# Altium PCB Carte_MiniPAMI 2024.PcbDoc
Units mm, origin at the board's own origin, x right, y up, seen from the top; angles counter-clockwise.
Board outline 21 x 11 mm, 2 copper layers (Component Side, Solder Side), stack 1.57 mm thick; 29 components, 17 nets, 67 pads, 17 vias.
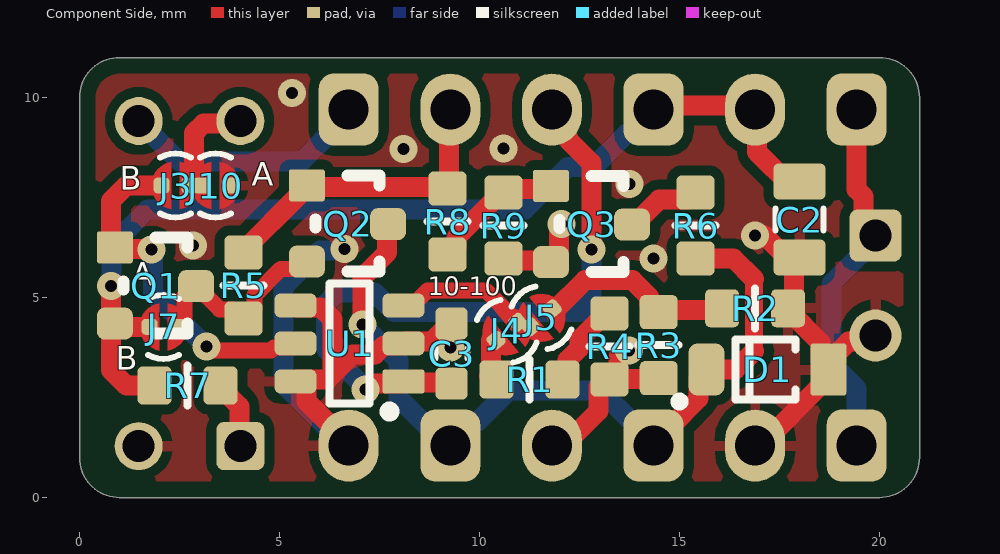
[diagram p0: Component Side view]
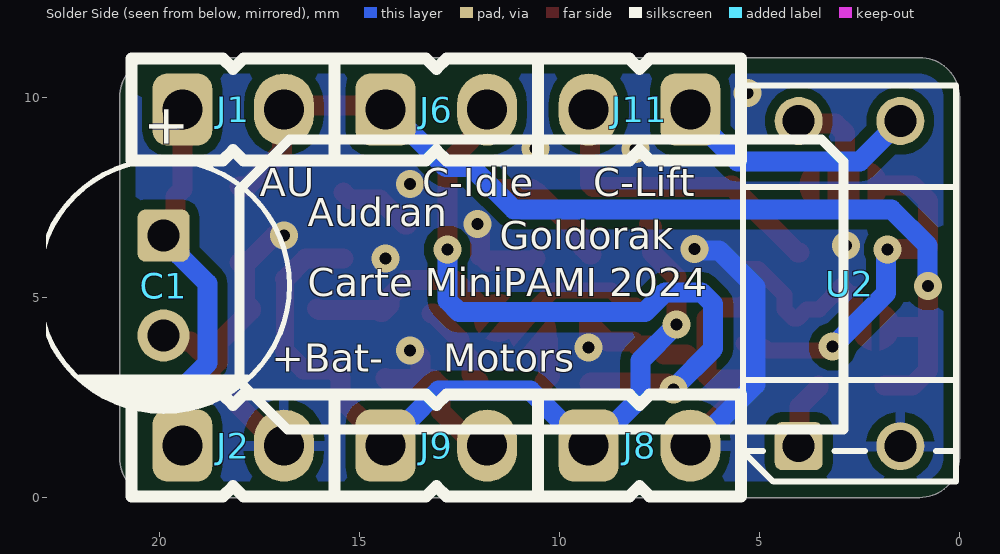
[diagram p1: Solder Side view, seen from below]
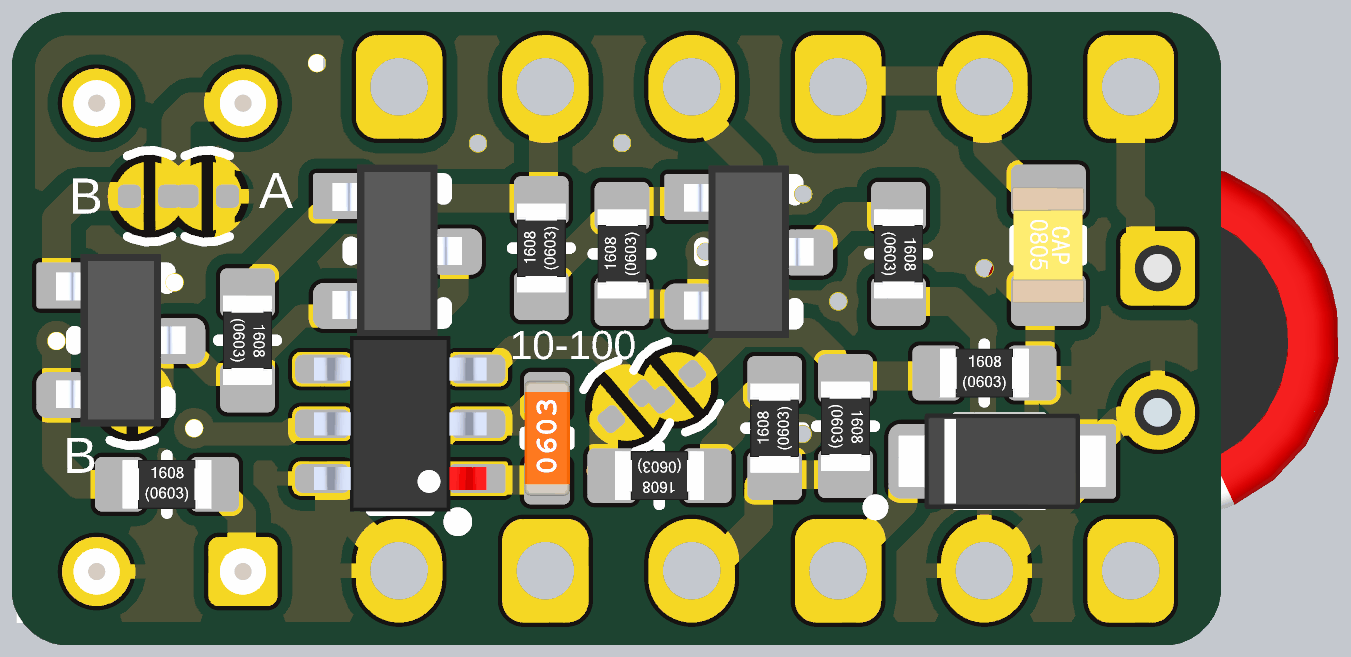
[diagram p2: 3D render of the assembled board from above, using the file's embedded part models]

## Layer stack, top to bottom
Top Solder: solder mask 0.01, Solder Resist, Dk 3.5
Component Side: signal copper 0.035
Dielectric 1: core 1.5, FR-4, Dk 4.8
Solder Side: signal copper 0.035
Bottom Solder: solder mask 0.01, Solder Resist, Dk 3.5

## Board outline
0,1 ccw(c1,1) 1,0 20,0 ccw(c20,1) 21,1 21,10 ccw(c20,10) 20,11 1,11 ccw(c1,10) 0,10

## Design rules (kind name [scope] priority, off if disabled: settings)
AssemblyTestPointUsage [All] p1 off:
AssemblyTestpoint [All] p1 off: testpointundercomponent=TRUE minsize=1.016 maxsize=2.54 preferedsize=1.524 minholesize=0 maxholesize=1.016 preferedholesize=0.813 testpointgrid=0.025 usegrid=TRUE gridtolerance=0 allowsidetop=TRUE allowsidebottom=TRUE
BoardOutlineClearance BoardOutlineClearance-Silk [All - OnSilkscreen] p1: gap=0.4 ignorepadtopadclearanceinfootprint=FALSE
BoardOutlineClearance BoardOutlineClearance_all [All] p2 off: gap=0.4 ignorepadtopadclearanceinfootprint=FALSE
Clearance Clearance_polygon [InPolygon] p1: gap=0.25 ignorepadtopadclearanceinfootprint=FALSE
Clearance Clearance_for_power_net [InNetClass('Power') vs InNet('GND')] p2: gap=0.2 ignorepadtopadclearanceinfootprint=TRUE except(0: Arc-Hole Track-Hole SMDPad-Hole THPad-Hole Via-Hole Fill-Hole Poly-Hole Region-Hole Text-Hole)
Clearance Clearance_general [All] p3: gap=0.15 ignorepadtopadclearanceinfootprint=FALSE
ComponentClearance [All] p1: gap=0 collisioncheckmode=3 verticalgap=0 showdistances=FALSE
DiffPairsRouting [All] p1 off: maxlimit=0.254 minlimit=0.127 mostfreqgap=0.254 toplayer_minwidth=0.381 toplayer_maxwidth=0.381 toplayer_prefwidth=0.381 bottomlayer_minwidth=0.381 bottomlayer_maxwidth=0.381 bottomlayer_prefwidth=0.381 maxuncoupledlength=12.7
FabricationTestPointUsage TestPointUsage [All] p1 off: valid=0 allowmultiple=FALSE
FabricationTestpoint Testpoint [All] p1 off: side=3 testpointundercomponent=TRUE minsize=1.016 maxsize=2.54 preferedsize=1.524 minholesize=0 maxholesize=1.016 preferedholesize=0.813 testpointgrid=0.025 allowsidetop=TRUE allowsidebottom=TRUE usegrid=TRUE gridtolerance=0
FanoutControl Fanout_BGA [IsBGA] p1 off: bgadir=Out bgaviamode=Centered fanoutstyle=Auto fanoutdirection=Alternating viagrid=0.025 // Fanout_BGA (Default Rule)
FanoutControl Fanout_LCC [IsLCC] p2 off: bgadir=Out bgaviamode=Centered fanoutstyle=Auto fanoutdirection=Alternating viagrid=0.025 // Fanout_LCC (Default Rule)
FanoutControl Fanout_SOIC [IsSOIC] p3 off: bgadir=Out bgaviamode=Centered fanoutstyle=Auto fanoutdirection=Alternating viagrid=0.025 // Fanout_SOIC (Default Rule)
FanoutControl Fanout_Small [(CompPinCount < 5)] p4 off: bgadir=Out bgaviamode=Centered fanoutstyle=Auto fanoutdirection=OutThenIn viagrid=0.025 // Fanout_Small (Default Rule)
FanoutControl Fanout_Default [All] p5 off: bgadir=Out bgaviamode=Centered fanoutstyle=Auto fanoutdirection=Alternating viagrid=0.025 // Fanout_Default (Default Rule)
Height [All] p1: minheight=0 maxheight=50 prefheight=10
HoleSize [All] p1: absolutevalues=TRUE maxlimit=6.3 minlimit=0.2 maxpercent=80.000 minpercent=20.000
HoleToHoleClearance [All] p1: gap=0.4 allowstackedmicrovias=TRUE
MinimumAnnularRing [All] p1: minimumring=0.076
MinimumSolderMaskSliver [All] p1: minsoldermaskwidth=0.1
MinimumSolderMaskSliver SilkscreenOverComponentPads [All] p2 off: minsoldermaskwidth=0.254
NetAntennae [All] p1 off: netantennaetolerance=0
PlaneClearance [All] p1: clearance=0.5
PlaneConnect [All] p1: planeconnectstyle=Relief reliefexpansion=0.4 reliefentries=4 reliefconductorwidth=0.3 reliefairgap=0.2
PolygonConnect PolygonConnect_Via_Power [InNetClass('PWR_20A') OR InNetClass('PWR_35A')] p1: connectstyle=Direct reliefconductorwidth=0.25 reliefentries=4 polygonreliefangle="90 Angle" airgapwidth=0.254
PolygonConnect [All] p2: thpad.connectstyle=Relief thpad.reliefconductorwidth=0.25 thpad.reliefentries=4 thpad.polygonreliefangle="90 Angle" thpad.airgapwidth=0.254 smdpad.connectstyle=Relief smdpad.reliefconductorwidth=0.25 smdpad.reliefentries=4 smdpad.polygonreliefangle="90 Angle" smdpad.airgapwidth=0.254 via.connectstyle=Direct via.reliefconductorwidth=0.25 via.reliefentries=4 via.polygonreliefangle="90 Angle" via.airgapwidth=0.254
PolygonConnect PolygonConnect_Via_GND [All vs InNet('GND')] p3: connectstyle=Direct reliefconductorwidth=0.25 reliefentries=4 polygonreliefangle="90 Angle" airgapwidth=0.254
RoutingCorners [All] p1: cornerstyle=45-Degree minsetback=1.5 maxsetback=2.54
RoutingVias [All] p1: holewidth=0.3 width=0.7 viastyle="Through Hole" minholewidth=0.3 minwidth=0.7 maxholewidth=0.3 maxwidth=1 useviatemplates=TRUE viatemplateguid#1={CC21C772-8D81-4508-B807-0997536BFA33} viatemplatename#1=v70h30m0mx0
SilkToSilkClearance [All] p1 off: silktosilkclearance=0.1
SilkToSolderMaskClearance [IsPad] p1 off: minsilkscreentomaskgap=0.254 clearancetoexposedcopper=TRUE
SolderMaskExpansion [All] p1: expansion=0.075 istentingtop=FALSE
Width [All] p1: maxlimit=15 minlimit=0.127 preferedwidth=0.2
9 further rules are at their usual default settings.

## Components (designator, comment, footprint, x,y, rotation, side; value= is the part's Value field where it differs from the comment)
C1 "220 uF" WCAP-ATG8_6.3x11x2.5x0.5 19.9,5.3 r90 bottom
C2 "10uF" "WCAP-CSGP_0805, 2x1.25x1.25" 18,6.95 r270 top
C3 "100nF" "WCAP-CSGP_0603, 1.6x0.8x0.8" 9.3,3.6 r90 top
D1 "RBR3MM40ATFTR" SOD-123FL 17.2,3.2 r180 top value=40V
J1 "22-03-2021" Conn_22-03-2021 18.16,9.7 r0 bottom
J2 "22-03-2021" Conn_22-03-2021 18.16,1.3 r0 bottom
J3 "open" CAVALIER 2.4,7.8 r270 top
J4 "open" CAVALIER 10.682,4.156 r310 top
J5 "open" CAVALIER 11.549,4.492 r130 top
J6 "22-03-2021" Conn_22-03-2021 13.08,9.7 r0 bottom
J7 "open" CAVALIER 2.1,4.266 r270 top
J8 "22-03-2021" Conn_22-03-2021 8,1.3 r0 bottom
J9 "22-03-2021" Conn_22-03-2021 13.08,1.3 r0 bottom
J10 "open" CAVALIER 3.4,7.8 r90 top
J11 "22-03-2021" Conn_22-03-2021 8,9.7 r180 bottom
Q1 "ZXM61P03FTA" SOT-23 1.9,5.3 r270 top
Q2 "ZXM61P03FTA" SOT-23 6.7,6.85 r270 top
Q3 "IRLML0040TRPBF" SOT-23 12.8,6.837 r270 top
R1 "RC0603FR-0710KL" RESC1608X06N 11.25,2.95 r180 top value=10k
R2 "" RESC1608X06N 16.89,4.732 r0 top value=33k
R3 "" RESC1608X06N 14.48,3.808 r270 top value=150k
R4 "RC0603FR-071KL" RESC1608X06N 13.25,3.774 r90 top value=1,2k
R5 "RC0603FR-07100KL" RESC1608X06N 4.1,5.3 r270 top value=100k
R6 "RC0603FR-07330RL" RESC1608X06N 15.4,6.8 r270 top value=330
R7 "RC0603FR-07330RL" RESC1608X06N 2.7,2.8 r0 top value=330
R8 "RC0603FR-071KL" RESC1608X06N 9.2,6.9 r90 top value=1k
R9 "RC0603FR-07100KL" RESC1608X06N 10.6,6.8 r90 top value=100k
U1 "TPL5110DDCT" SOT23_95P280X145-6N 6.75,3.85 r180 top
U2 "OPB620" OPB620 2.75,5.35 r90 bottom

## Footprints (in the part's own frame and the unit in brackets; to place one, negate y for a bottom-side part, rotate by r counter-clockwise, add the part's x,y. Pads: shape width x height; smd on the part's side, far side on the other; paste and mask are expansions set on the pad)
CAVALIER [mm] "Connection personnalisé pour bord de carte"
  rrect50% 0.4x0.4 smd: 1(0,-0.35) 2(0,0.35)
  Component Side region: -0.591,0.102 0.591,0.102 0.591,0.102 0.482,0.357 0.27,0.536 0,0.6 -0.27,0.536 -0.482,0.357 -0.591,0.102
  Component Side region: -0.591,-0.102 -0.482,-0.357 -0.27,-0.536 0,-0.6 0.27,-0.536 0.482,-0.357 0.591,-0.102 0.591,-0.102
  silkscreen extent -0.8,-0.39 0.8,0.39
Conn_22-03-2021 [mm]
  rrect50% 1.5x1.8 hole 1: 1(1.27,0)
  oval 1.5x1.8 hole 1: 2(-1.27,0)
  silkscreen extent -2.54,-1.27 2.54,1.27, body extent -2.54,-1.27 2.54,1.27, height 11.6
OPB620 [mm]
  rrect30% 1.2x1.2 hole 0.8: 1(-4.064,1.27)
  round 1.2 hole 0.8: 2(-4.064,-1.27) 3(4.064,-1.27) 4(4.064,1.27)
  silkscreen extent -4.95,-2.67 4.95,2.67, body extent -4.96,-2.66 4.95,2.67, height 9.37
RESC1608X06N [mm] "Chip Resistor, 2-Leads, Body 1,6x0,8mm, IPC Medium Density"
  rrect30% 0.85x0.95 smd: 1(-0.825,0) 2(0.825,0)
  silkscreen extent 0,-0.5 0,0.5, body extent -0.78,-0.43 0.78,0.43, height 0.45
SOD-123FL [mm] "SOD-123FL"
  rrect15% 0.9x1.3 smd: 1(-1.525,0)
  rrect50% 0.9x1.3 smd: 2(1.525,0)
  silkscreen extent -0.7,-0.75 2.3,0.9, body extent -1.8,-0.83 1.8,0.82, height 0.95
SOT23_95P280X145-6N [mm] "SOT23, 6-Leads, Body 3,1x3,2mm (max), Pitch 0,95mm, IPC Medium Densit"
  rrect20% 1.05x0.6 smd paste-0.05 mask+0.07: 1(-1.35,0.95)
  rrect50% 1.05x0.6 smd paste-0.05 mask+0.07: 2(-1.35,0) 3(-1.35,-0.95) 4(1.35,-0.95) 5(1.35,0) 6(1.35,0.95)
  silkscreen extent -1.13,-1.5 0.5,1.82, body extent -1.5,-1.52 1.5,1.52, height 1.45
SOT-23 [mm]
  rrect15% 0.8x0.9 smd: 1(-0.952,-1.016)
  rrect50% 0.8x0.9 smd: 2(0.953,-1.016) 3(0.013,1.016)
  silkscreen extent -1.2,-0.8 1.2,0.8, body extent -1.5,-1.13 1.5,1.13, height 1.22
WCAP-ATG8_6.3x11x2.5x0.5 [mm] "Polarized capacitors, Aluminum Electrolytic Capacitors, 2-Leads, Body 6.3x11x2.5x0.5"
  rrect30% 1.3x1.3 hole 0.8: 1(1.25,0)
  round 1.3 hole 0.8: 2(-1.25,0)
  silkscreen extent -3.15,-3.15 3.15,3.15, body extent -3.14,-3.15 3.15,3.15, height 11.11
"WCAP-CSGP_0603, 1.6x0.8x0.8" [mm] "WCAP-CSGP Ceramic Capacitors, size 0603, body 1.6x0.8x0.8"
  rrect30% 0.8x0.8 smd: 1(-0.75,0) 2(0.75,0)
  silkscreen extent -0.13,-0.4 0.13,0.4, body extent -1,-0.39 1,0.39, height 0.8
"WCAP-CSGP_0805, 2x1.25x1.25" [mm] "WCAP-CSGP Ceramic Capacitors, size 0805, body 2x1.25x1.25"
  rrect30% 0.9x1.3 smd: 1(-0.95,0) 2(0.95,0)
  silkscreen extent -0.28,-0.6 0.28,0.6, body extent -1,-0.63 1,0.62, height 1.25

## Part data
C1: library part "WCAP-ATG8, 860010373010", "CAP Alu 220 UF 20% 16 V", Manufacturer="Wurth Elektronik", Manufacturer Part Number=860010373010, RatedVoltage=16V, ComponentLink1Description=Datasheet, ComponentLink1URL=http://katalog.we-online.de/pbs/datasheet/860010373010.pdf, Size=6.3mmx11mm
C2: library part "WCAP-CSGP, 885012207026", "CAP CER 10uF 10V X7R 0805", Manufacturer="Wurth Elektronik", Manufacturer Part Number=885012207026, RatedVoltage=10V, SUPPLIER PART NUMBER 1=2495189, CeramicType=X7R, ComponentLink1Description=Datasheet, ComponentLink1URL=http://katalog.we-online.com/pbs/datasheet/885012207026.pdf, Size=0805, SUPPLIER 1=Farnell, SUPPLIER 2=JLCPCB, Supplier Footprint 2=0805, SUPPLIER PART NUMBER 2=C15850
C3: library part "WCAP-CSGP, 885012206095", "CAP CER 100nF 50V X7R 0603", Manufacturer="Wurth Elektronik", Manufacturer Part Number=885012206095, RatedVoltage=50V, SUPPLIER PART NUMBER 1=2495187, CeramicType=X7R, ComponentLink1Description=Datasheet, ComponentLink1URL=http://katalog.we-online.com/pbs/datasheet/885012206095.pdf, Size=0603, SUPPLIER 1=Farnell, SUPPLIER 2=JLCPCB, Supplier Footprint 2=0603, SUPPLIER PART NUMBER 2=C14663
D1: "DIODE SCHOTTKY 40V 3A SOD123-FL", ContinuousForwardCurrent=3A, Manufacturer=ROHM, SUPPLIER PART NUMBER 1=2581593, ComponentLink1Description=Datasheet, ComponentLink1URL=http://www.farnell.com/datasheets/2067190.pdf, ComponentLink2Description=Manufacturer, ComponentLink2URL=http://www.rohm.com/web/global/products/-/product/RBR3MM40ATF, Manufacturer Part Number=RBR3MM40ATFTR, SUPPLIER 1=Farnell, SUPPLIER 2=JLCPCB, Supplier Footprint 2=SOD-123, SUPPLIER PART NUMBER 2=C8598, Type=Schottky
J1 J2 J6 J8 J9 J11: library part Conn_22-03-2021, "CONN HEADER VERT 2POS 2.54MM", Manufacturer=MOLEX, SUPPLIER PART NUMBER 1=9731075, ComponentLink1Description=Datasheet, ComponentLink1URL=http://www.farnell.com/datasheets/1791308.pdf, ComponentLink2Description=Drawings, ComponentLink2URL="http://www.farnell.com/cad/495071.pdf  http://www.farnell.com/cad/1533907.pdf  http://www.farnell.com/cad/1533907.pdf", Manufacturer Part Number=22-03-2021, SUPPLIER 1=Farnell
J3 J4 J5 J7 J10: library part CAVALIER_DOT, "Cavalier soudure \"ouvert\", pastille fendue 1.2mm"
Q1 Q2: "MOSFET P-CH 30V 1.1A SOT23-3", Manufacturer="Diodes Incorporated", SUPPLIER PART NUMBER 1=9227673, ComponentLink1Description=Datasheet, ComponentLink1URL=https://www.diodes.com/assets/Datasheets/ZXM61P03F.pdf, Manufacturer Part Number=ZXM61P03FTA, SUPPLIER 1=Rs, SUPPLIER 2=JLCPCB, Supplier 3=Evolutek, Supplier Footprint 2=SOT-23-3, SUPPLIER PART NUMBER 2=C156274
Q3: library part IRLML0040, "MOSFET N 40V 3.6A SOT23", Manufacturer="INTERNATIONAL RECTIFIER", SUPPLIER PART NUMBER 1=1831088, ComponentLink1Description=Datasheet, ComponentLink1URL=http://www.irf.com/product-info/datasheets/data/irlml0040pbf.pdf, Manufacturer Part Number=IRLML0040TRPBF, SUPPLIER 1=Farnell
R1: "RES SMD 10K OHM 1% 1/10W 0603", Manufacturer=Yageo, POWER=100mW, SUPPLIER PART NUMBER 1=9238603, ComponentLink1Description=Manufacturer, ComponentLink1URL=http://www.yageo.com/NewPortal/_en/index.jsp, ComponentLink2Description=Datasheet, ComponentLink2URL=http://www.farnell.com/datasheets/2167052.pdf, Manufacturer Part Number=RC0603FR-0710KL, Precision=±1%, SUPPLIER 1=Farnell, SUPPLIER 2=JLCPCB, Supplier Footprint 2=0603, SUPPLIER PART NUMBER 2=C25804, Type="Thick Film", Vmax=50V
R2: library part RC0603FR-0710KL, "RES SMD 33K OHM 1% 1/10W 0603", Manufacturer=Yageo, POWER=100mW, SUPPLIER PART NUMBER 1=9238603, ComponentLink1Description=Manufacturer, ComponentLink1URL=http://www.yageo.com/NewPortal/_en/index.jsp, ComponentLink2Description=Datasheet, ComponentLink2URL=http://www.farnell.com/datasheets/2167052.pdf, Precision=±1%, SUPPLIER 1=Farnell, SUPPLIER 2=JLCPCB, Supplier Footprint 2=0603, SUPPLIER PART NUMBER 2=C25804, Type="Thick Film", Vmax=50V
R3: library part RC0603FR-07100KL, "RES SMD 150K OHM 1% 1/10W 0603", Manufacturer=Yageo, POWER=100mW, SUPPLIER PART NUMBER 1=2309107, ComponentLink1Description=Manufacturer, ComponentLink1URL=http://www.yageo.com/NewPortal/_en/index.jsp, ComponentLink2Description=Datasheet, ComponentLink2URL=http://www.farnell.com/datasheets/2167052.pdf, Precision=±1%, SUPPLIER 1=Farnell, SUPPLIER 2=JLCPCB, Supplier Footprint 2=0603, SUPPLIER PART NUMBER 2=C25803, Type="Thick Film", Vmax=50V
R4: "RES SMD 1,2K OHM 1% 1/10W 0603", Manufacturer=Yageo, POWER=100mW, SUPPLIER PART NUMBER 1=9238484, ComponentLink1Description=Manufacturer, ComponentLink1URL=http://www.yageo.com/NewPortal/_en/index.jsp, ComponentLink2Description=Datasheet, ComponentLink2URL=http://www.farnell.com/datasheets/2167052.pdf, Manufacturer Part Number=RC0603FR-071KL, Precision=±1%, SUPPLIER 1=Farnell, SUPPLIER 2=JLCPCB, Supplier Footprint 2=0603, SUPPLIER PART NUMBER 2=C21190, Type="Thick Film", Vmax=50V
R5 R9: "RES SMD 100K OHM 1% 1/10W 0603", Manufacturer=Yageo, POWER=100mW, SUPPLIER PART NUMBER 1=2309107, ComponentLink1Description=Manufacturer, ComponentLink1URL=http://www.yageo.com/NewPortal/_en/index.jsp, ComponentLink2Description=Datasheet, ComponentLink2URL=http://www.farnell.com/datasheets/2167052.pdf, Manufacturer Part Number=RC0603FR-07100KL, Precision=±1%, SUPPLIER 1=Farnell, SUPPLIER 2=JLCPCB, Supplier Footprint 2=0603, SUPPLIER PART NUMBER 2=C25803, Type="Thick Film", Vmax=50V
R6 R7: "RES SMD 330 OHM 1% 1/10W 0603", Manufacturer=Yageo, POWER=100mW, SUPPLIER PART NUMBER 1=9238425, ComponentLink1Description=Manufacturer, ComponentLink1URL=http://www.yageo.com/NewPortal/_en/index.jsp, ComponentLink2Description=Datasheet, ComponentLink2URL=http://www.farnell.com/datasheets/2167052.pdf, Manufacturer Part Number=RC0603FR-07330RL, Precision=±1%, SUPPLIER 1=Farnell, SUPPLIER 2=JLCPCB, Supplier Footprint 2=0603, SUPPLIER PART NUMBER 2=C23138, Type="Thick Film", Vmax=50V
R8: "RES SMD 1K OHM 1% 1/10W 0603", Manufacturer=Yageo, POWER=100mW, SUPPLIER PART NUMBER 1=9238484, ComponentLink1Description=Manufacturer, ComponentLink1URL=http://www.yageo.com/NewPortal/_en/index.jsp, ComponentLink2Description=Datasheet, ComponentLink2URL=http://www.farnell.com/datasheets/2167052.pdf, Manufacturer Part Number=RC0603FR-071KL, Precision=±1%, SUPPLIER 1=Farnell, SUPPLIER 2=JLCPCB, Supplier Footprint 2=0603, SUPPLIER PART NUMBER 2=C21190, Type="Thick Film", Vmax=50V
U1: "IC OSC PROG TIMER TSOT23-6", Manufacturer="TEXAS INSTRUMENTS", SUPPLIER PART NUMBER 1=3121221, ComponentLink1Description=Datasheet, ComponentLink1URL=https://www.ti.com/lit/ds/symlink/tpl5110.pdf, Manufacturer Part Number=TPL5110DDCT, SUPPLIER 1=Farnell, SUPPLIER 2=LCSC, SUPPLIER PART NUMBER 2=C125830
U2: "SENSOR OPT SLOT TRANS W/RES PCB", Manufacturer="TT ELECTRONICS", SUPPLIER PART NUMBER 1=491330, ComponentLink1Description=Datasheet, ComponentLink1URL=http://www.farnell.com/datasheets/2702441.pdf, Manufacturer Part Number=OPB620, SUPPLIER 1=Farnell

## Via types
v1: diameter 0.7, hole 0.3, Component Side to Solder Side, tented both sides, 17 vias

## Nets (pads, with @x,y where several pads share a name; then routed paths per layer and width w, separated by ;. In a path a pad name is that pad's centre, name@x,y a point inside that pad or via, vN(x,y) a via of type N, cw(c..) or ccw(c..) an arc to the next point about the centre after c; other vN are vias at no path point)
3L: C2.1 J1.2 J6.1 J7.1 Q1.2 R7.1 | length 24.8
  Component Side w0.5: v1(0.784,5.287) Q1.2@0.784,4.347 ; J7.1@1.66,4.266 0.865,4.266 Q1.2@0.784,4.347 ; R7.1 1.171,2.8 0.784,3.187 Q1.2@0.784,4.347 ; J6.1@14.35,9.8 J1.2@16.89,9.8 ; J1.2@16.89,9.35 16.941,9.299 16.941,8.634 17.8,7.775 C2.1@18,7.775
  Solder Side w0.5: v1(0.784,5.287) 0.803,5.306 0.803,6.304 1.699,7.2 11.139,7.2 12.199,8.26 12.841,8.26 13.709,9.127 14.127,9.127 J6.1@14.35,9.35
ALIM_MOT: J7.2 Q1.3 Q2.2 R5.2 | length 5.2
  Component Side w0.4: J7.2 2.45,4.325 2.618,4.493 2.618,5.056 2.649,5.087 2.716,5.087 Q1.3 2.966,5.287 3.166,5.087 3.166,5.042 3.506,4.702 3.823,4.702 4.05,4.475 4.15,4.475 4.375,4.7 4.375,5.057 5.036,5.718 5.505,5.718 Q2.2
BATT: C1.1 J1.1 J2.1 | length 9
  Component Side w0.5: J1.1@19.43,9.35 19.43,7.7 19.6,7.53 19.6,6.95 C1.1@20,6.55
  Solder Side w0.5: J2.1@19.43,1.35 19.43,2.727 18.8,3.357 18.8,5.35 19.5,6.05 19.5,6.15 C1.1
BRAKE: J11.2 Q2.1 R5.1 R8.2 | length 7.5
  Component Side w0.5: R5.1@4,6.125 4.05,6.125 5.534,7.609 5.534,7.652 Q2.1 5.734,7.802 5.773,7.764 9.161,7.764 9.235,7.837 9.235,9.315 J11.2@9.27,9.35
ENABLE_TIMER: C3.1 J6.2 U1.1 | length 16.7
  Component Side w0.5: v1(7.151,2.7) 7.301,2.85 8.05,2.85 U1.1 8.125,2.875 9.225,2.875 C3.1@9.25,2.85 ; J6.2@11.81,9.35 11.839,9.35 12.221,8.969 12.221,8.939 12.8,8.36 v1(12.8,6.2)
  Solder Side w0.5: v1(7.151,2.7) 7.151,2.727 6.157,3.721 6.157,4.838 6.45,5.131 7.369,5.131 7.868,4.632 12.507,4.632 12.8,4.925 v1(12.8,6.2)
GND: C1.2 C2.2 C3.2 D1.1 J2.2 J8.2 J9.2 J10.1 Q3.2 R2.2 R3.2 R4.1 R9.1 U1.2 U1.4 U1.6 U2.2 | length 32.7
  Component Side w0.5: U1.4 5.45,4.75 6.032,4.75 6.325,4.457 6.325,3.082 ; J8.2@6.73,1.35 5.669,2.411 5.669,2.85 5.619,2.9 U1.6 5.45,2.95 6.193,2.95 6.82,3.577 7.386,3.577 7.609,3.8 8.05,3.8 8.15,3.9 8.8,3.9 9.25,4.35 9.26,4.34 9.26,3.76 v1(9.27,3.75) ; R9.1 10.645,5.93 11.739,5.93 Q3.2 11.934,6.035 11.984,6.035 11.984,6.719 12.05,6.785 v1(12.05,6.84) ; J9.2@11.81,1 12.975,2.165 12.975,2.774 13.15,2.949 R4.1@13.2,2.949 ; v1(13.733,3.674) 13.731,3.676 13.641,3.676 13.475,3.51 13.475,3.124 13.3,2.949 R4.1@13.2,2.949 ; R3.2@14.35,2.983 14.333,2.966 13.217,2.966 R4.1@13.2,2.949 ; J2.2@16.89,1 16.89,1.165 18.725,3 D1.1 ; v1(16.89,6.55) 17.125,6.55 17.8,5.875 18,5.875 17.857,5.732 17.857,4.874 R2.2 17.715,4.682 18.525,3.872 18.525,3.4 D1.1 ; C1.2@20,4.05 19.847,3.897 19.222,3.897 18.725,3.4 D1.1
  Solder Side w0.5: v1(6.624,6.214) 6.586,6.176 6.009,6.176 5.1,5.267 5.1,2.83 6.58,1.35 J8.2@6.73,1.35
  other v1: 14.354,5.975 2.833,6.304 13.743,7.837 8.1,8.717 10.6,8.724 5.306,10.111
MOTOR: D1.2 J8.1 J9.1 Q2.3 R6.2 | length 20.3
  Component Side w0.45: 16.865,3.665 16.865,5.46
  Component Side w0.5: v1(7.075,4.327) 7.075,5.51 7.687,6.123 7.687,6.759 Q2.3@7.766,6.837 ; J9.1@14.35,1.35 14.482,1.35 14.773,1.64 14.773,1.773 15.475,2.475 15.475,3 D1.2 16.4,3.2 16.865,3.665 ; R6.2 16.35,5.975 16.865,5.46
  Solder Side w0.5: v1(7.075,4.327) 7.98,3.422 7.98,2.49 8.62,1.85 8.702,1.85 8.813,1.739 8.705,1.765 J8.1@9.27,1.2 ; J8.1@9.552,1.565 9.552,1.665 9.76,1.873 9.925,1.873 10.729,2.677 13.023,2.677 13.827,1.873 13.86,1.873 14.35,1.382 J9.1@14.35,1.35
NetJ3_1: J3.1 Q1.1 U1.5 | length 9
  Component Side w0.4: v1(3.173,3.773) 3.254,3.773 3.352,3.675 4.791,3.675 4.866,3.75 5.3,3.75 U1.5
  Component Side w0.5: v1(1.8,6.2) 1.781,6.219 0.817,6.219 0.784,6.252 0.784,7.413 1.171,7.8 J3.1
  Solder Side w0.5: v1(1.8,6.2) 1.838,6.162 1.838,5.107 v1(3.173,3.773)
NetJ4_1: J4.1 R1.2 | length 1.1
  Component Side w0.5: J4.1@10.282,3.935 10.282,3.931 10.282,3.086 10.235,3.04 R1.2@10.375,2.9
NetJ4_2: J4.2 J5.2 U1.3 | length 3.3
  Component Side w0.4: U1.3 8.325,4.8 8.703,5.178 10.154,5.178 J4.2
NetJ5_1: J5.1 R2.1 R3.1 | length 5.1
  Component Side w0.5: J5.1@11.868,4.668 12.635,5.435 13.823,5.435 14.255,5.003 14.255,4.808 14.43,4.633 R3.1 ; R3.1@14.381,4.682 16.016,4.682 R2.1
NetQ3_1: Q3.1 R8.1 R9.2 | length 3.4
  Component Side w0.5: R8.1 9.25,6.075 9.425,6.25 9.425,6.5 10.55,7.625 R9.2 10.682,7.707 11.702,7.707 Q3.1
NetQ3_3: Q3.3 R6.1 | length 1.9
  Component Side w0.5: Q3.3 13.866,6.825 14.491,7.45 15.225,7.45 R6.1
NetR1_1: R1.1 R4.2 | length 2.2
  Component Side w0.5: R1.1@12.025,2.9 12.2,3.075 12.2,3.436 12.5,3.736 12.5,3.949 13.15,4.599 R4.2@13.2,4.599
OPB_A: R7.2 U2.1 | length 1.7
  Component Side w0.5: R7.2 3.525,2.75 4,2.275 4,1.306 U2.1
OPB_D: J3.2 J10.2 U2.4 | length 2.6
  Component Side w0.5: J3.2 2.859,7.909 2.859,9.107 3.102,9.35 3.956,9.35 U2.4
OPB_S: J11.1 U2.3 | length 6.1
  Solder Side w0.5: U2.3 2.494,8.4 5.548,8.4 6.23,9.082 6.498,9.35 J11.1@6.73,9.35

## Polygon pours and split planes (outlines as drawn)
GND on Solder Side "NONET_L-01_P-001" (solid, pour order 1): 0,1 ccw(c1,1) 1,0 20,0 ccw(c20,1) 21,1 21,10 ccw(c20,10) 20,11 1,11 ccw(c1,10) 0,10
GND on Component Side "NONET_L-01_P-001" (solid, pour order 0): 0,1 ccw(c1,1) 1,0 20,0 ccw(c20,1) 21,1 21,10 ccw(c20,10) 20,11 1,11 ccw(c1,10) 0,10

## Silkscreen, mask and mechanical layers (free items; w line width, h text height)
Top Overlay:
  text "A" at 4.3,7.6 h1
  text "B" at 1,7.5 h1
  text "A" at 1.3,5.1 h1
  text "10-100" at 8.7,4.9 h0.8
  text "B" at 0.9,3 h1
Bottom Overlay:
  lines w0.254: 2.9,1.7 16.8,1.7 18,2.9 18,7.7 16.75,8.95 3.45,8.95 2.9,8.4 2.9,1.7
  text "AU         C-Idle     C-Lift" at 17.5,7.3 h1.2
  text "Audran" at 16.3,6.55 h1.2
  text "Goldorak" at 11.497,5.975 h1.2
  text "Carte MiniPAMI 2024" at 16.3,4.8 h1.2
  text "+Bat-     Motors" at 17.2,2.907 h1.2
Board Outline:
  the board outline again, w0.1

## Dimensions
1,0 to 1,11 on Dimension
0,1 to 21,1 on Dimension

## Text inside footprints (layer, text, board x,y; h text height)
C1: Bottom Overlay "+" at 19.4,8.7 h1 r270; Bottom 3D Body "+" at 19.4,7.5 h1 r270